# Altium PCB 9VPCB.PcbDoc
Units mil, origin at the board's own origin, x right, y up, seen from the top; angles counter-clockwise.
Board outline 6000 x 4000 mil, 4 copper layers (Top Layer, Signal Layer 1, GND, Bottom Layer), stack 30.634 mil thick; 34 components, 95 nets, 104 pads, 36 vias.
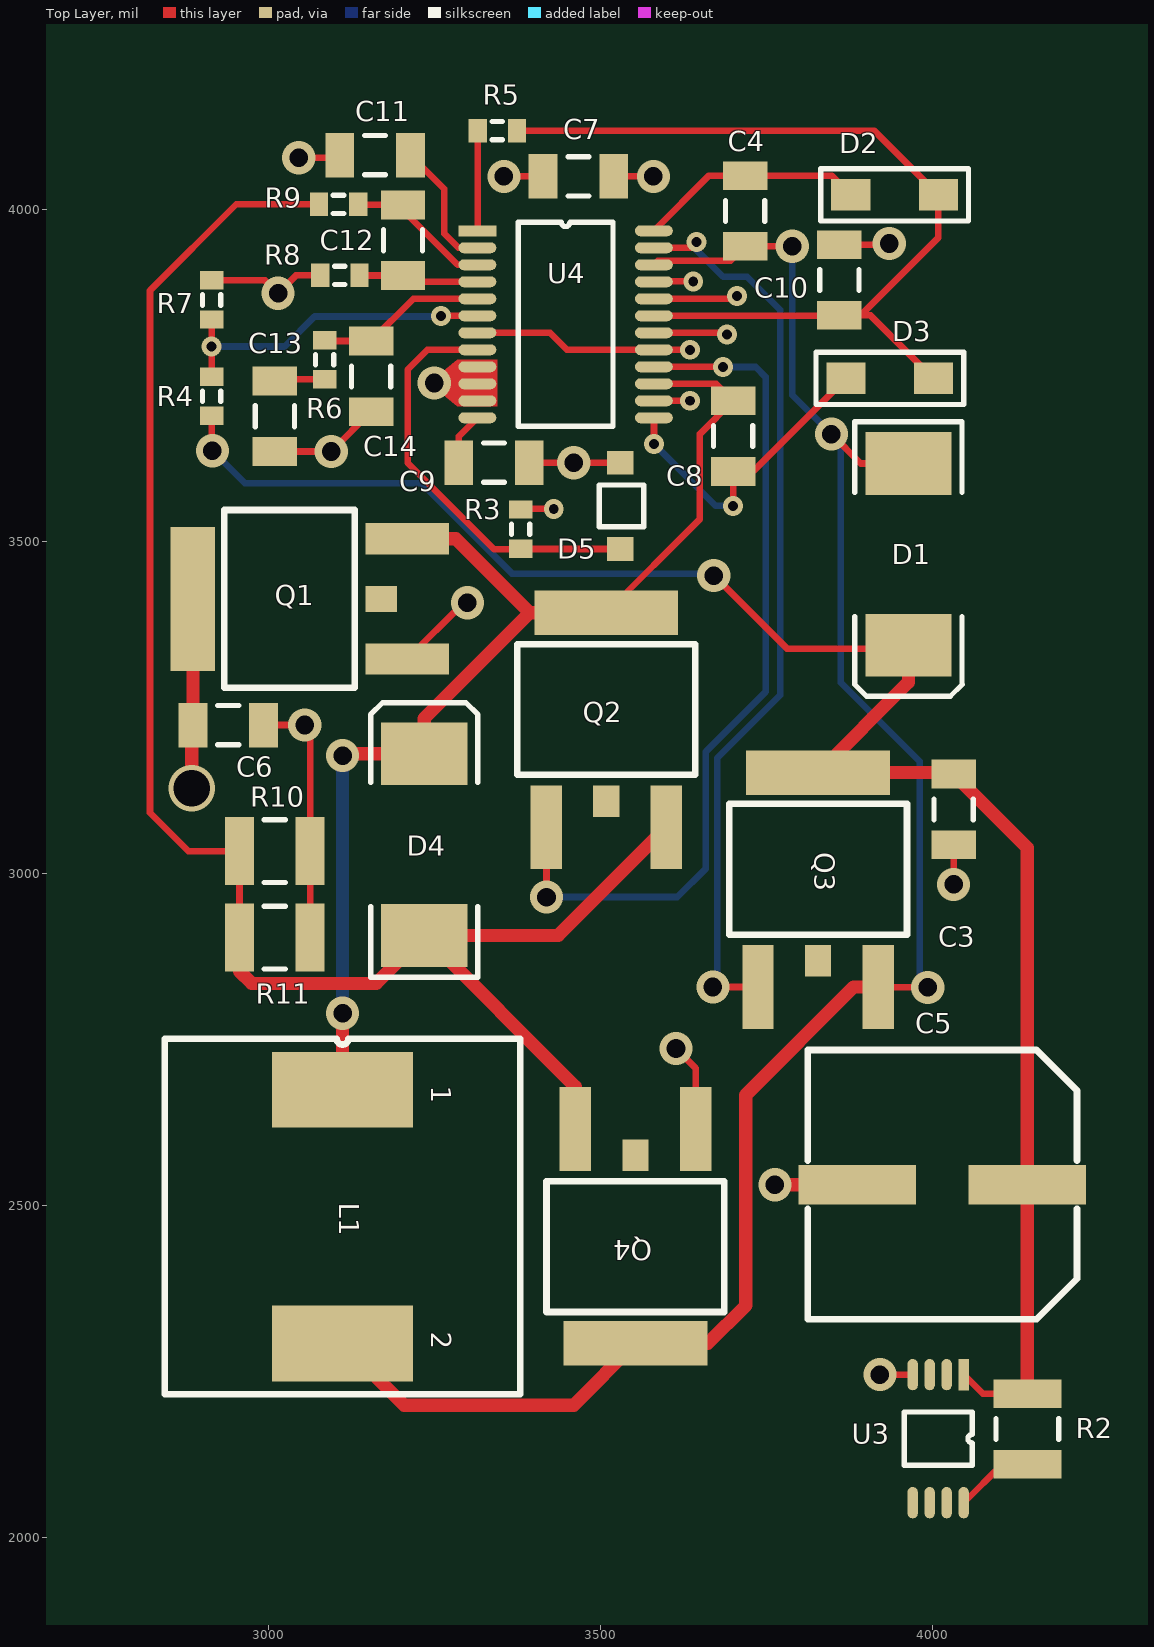
[diagram p0: Top Layer view]
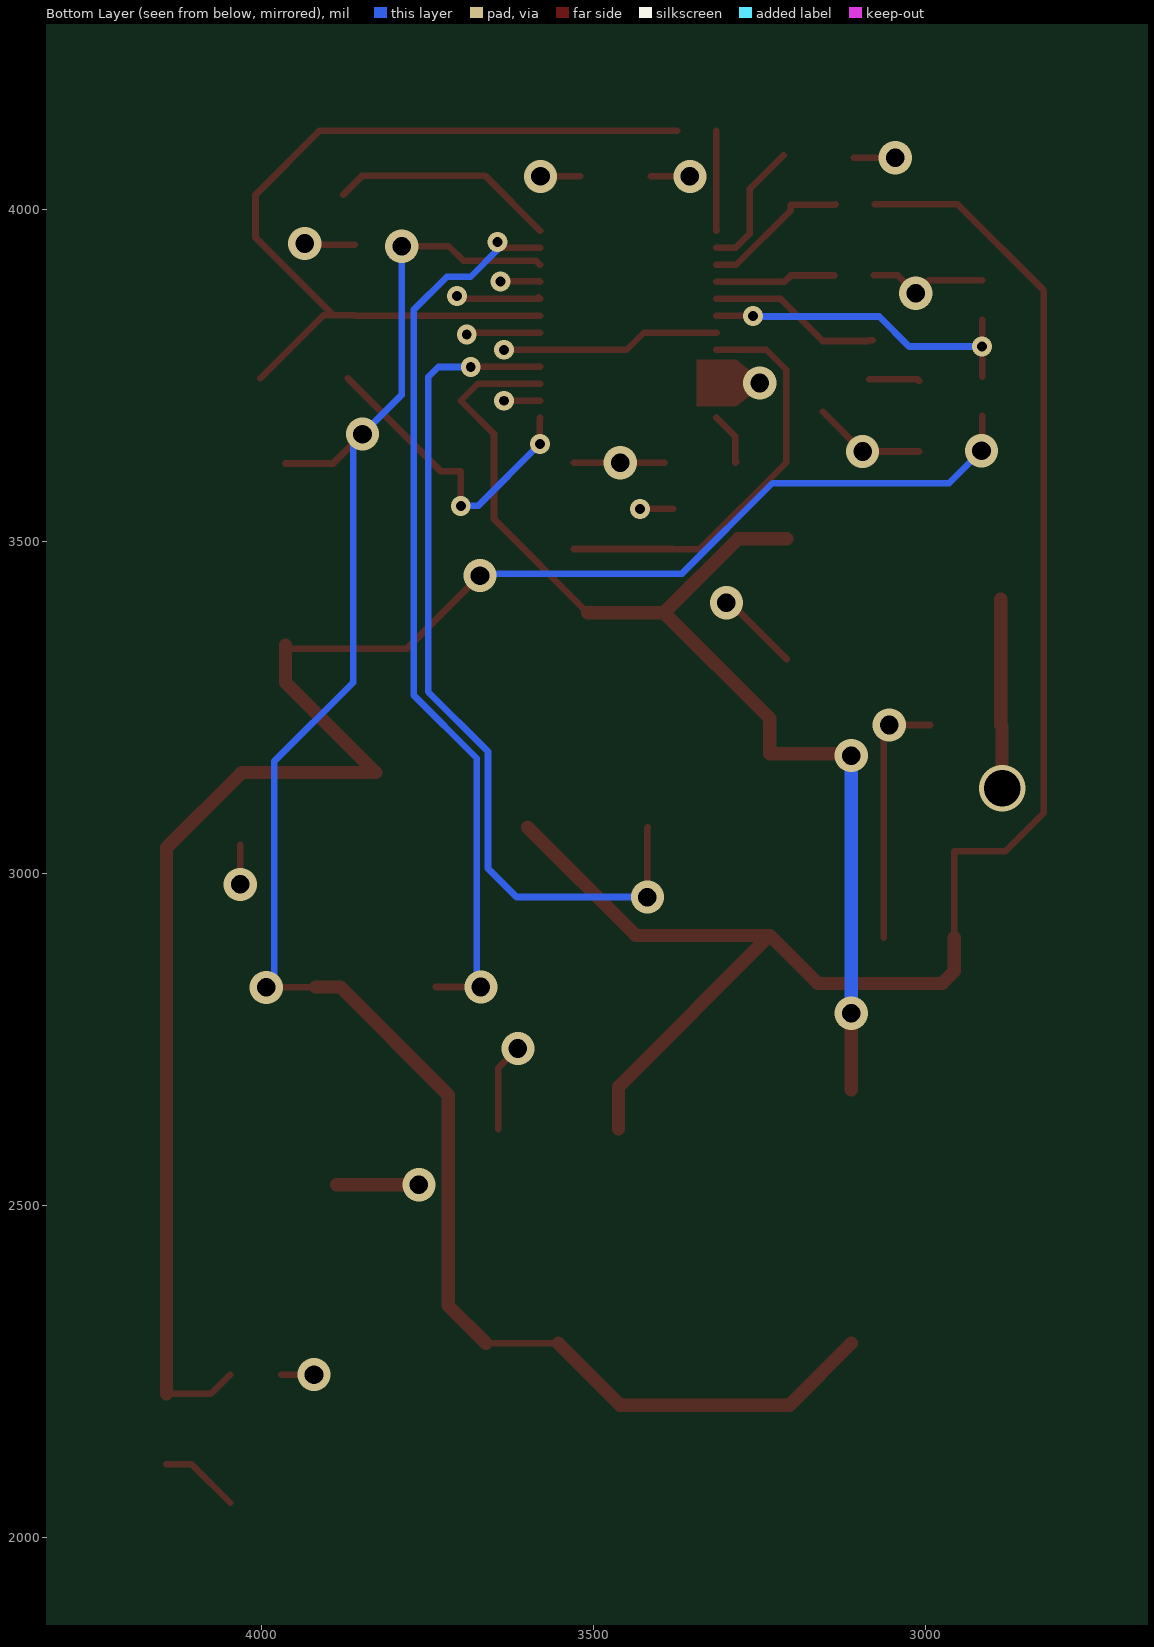
[diagram p1: Bottom Layer view, seen from below]
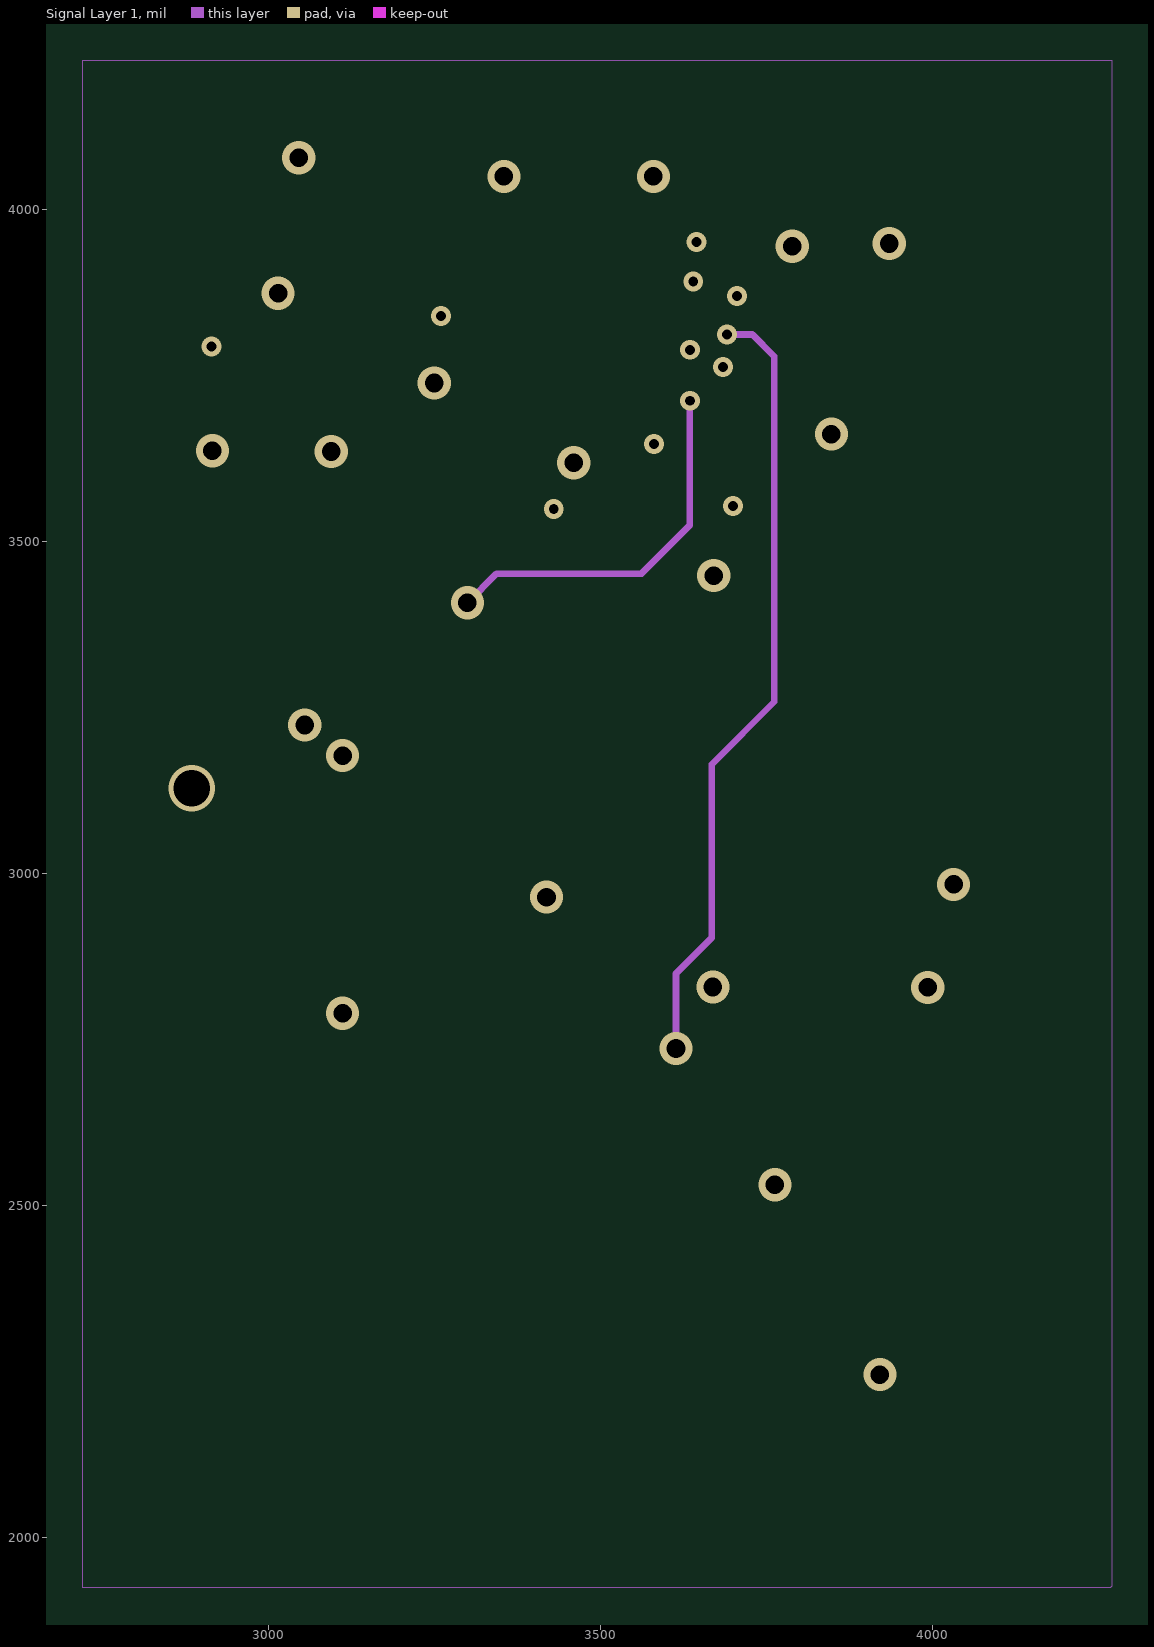
[diagram p2: Signal Layer 1]
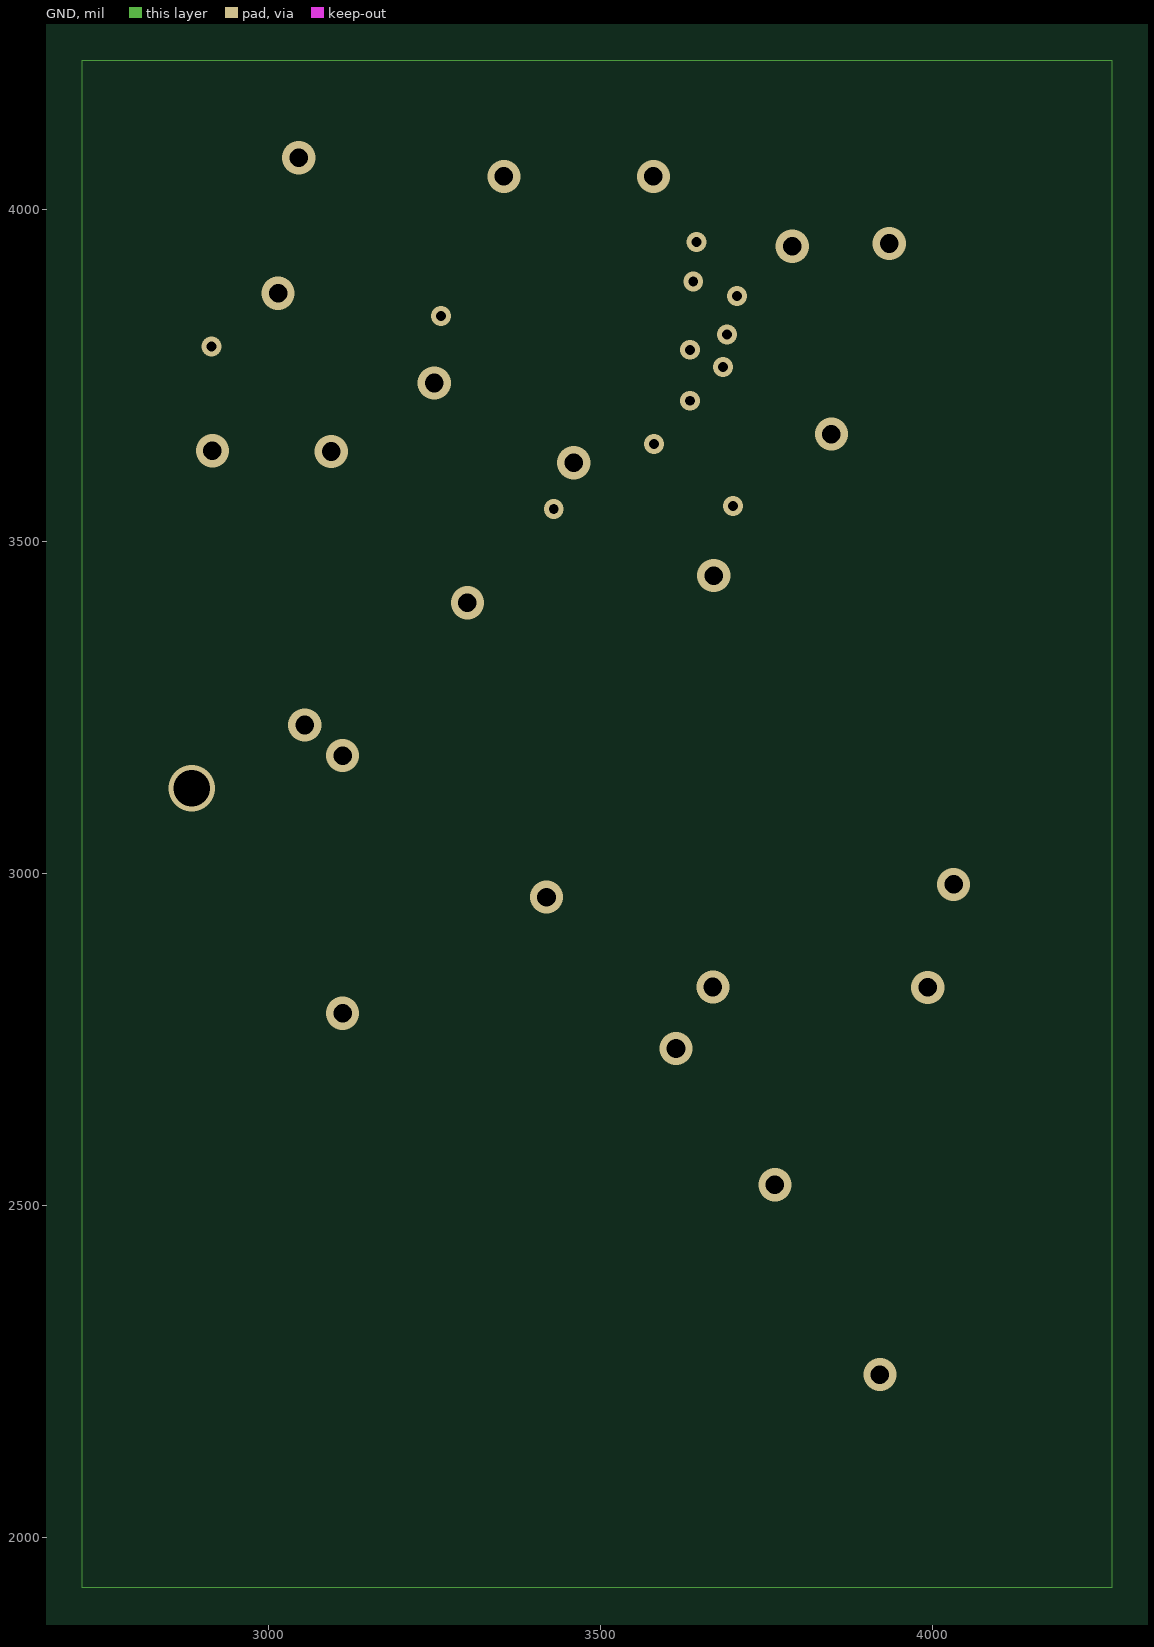
[diagram p3: GND]

## Layer stack, top to bottom
Top Solder: solder mask 0.4, Solder Resist, Dk 3.5
Top Layer: signal copper 1.4
Dielectric 1: core 10, FR-4, Dk 4.2
Signal Layer 1: signal copper 1.417
Dielectric 3: prepreg 5, Dk 4.2
GND: signal copper 1.417
Dielectric 2: core 10, Dk 4.2
Bottom Layer: signal copper 1.4
Bottom Solder: solder mask 0.4, Solder Resist, Dk 3.5

## Board outline
1000,1000 7000,1000 7000,5000 1000,5000

## Design rules (kind name [scope] priority, off if disabled: settings)
Clearance Clearance_2 [InNamedPolygon('GND-No Net')] p1: gap=10 ignorepadtopadclearanceinfootprint=FALSE except(0: Arc-Hole Track-Hole SMDPad-Hole THPad-Hole Via-Hole Fill-Hole Poly-Hole Region-Hole Text-Hole)
Clearance Clearance_1 [InNamedPolygon('NONET_L02_P008')] p2: gap=10 ignorepadtopadclearanceinfootprint=FALSE except(0: Arc-Hole Track-Hole SMDPad-Hole THPad-Hole Via-Hole Fill-Hole Poly-Hole Region-Hole Text-Hole)
Clearance [All] p3: gap=5 ignorepadtopadclearanceinfootprint=TRUE
PolygonConnect [All] p1: connectstyle=Relief reliefconductorwidth=10 reliefentries=4 polygonreliefangle="90 Angle" airgapwidth=10
RoutingVias [All] p1: holewidth=28 width=50 viastyle="Through Hole" minholewidth=15 minwidth=30 maxholewidth=60 maxwidth=80
SolderMaskExpansion [All] p1: expansion=4
Width [All] p1: maxlimit=50 minlimit=10 preferedwidth=10
30 further rules are at their usual default settings.

## Classes and differential pairs
component class Full_Power_Board: U13
component class 48V: U11 U12
component class 48V_0.5A: U9 U10
component class 19V: C28 D12 D13 D15 Q9 Q10 Q11 Q12 U7 U8
component class 12V: C16 D7 D8 D10 L2 Q5 Q6 Q7 Q8 U5 U6
component class 5V: U1 U2

## Components (designator, comment, footprint, x,y, rotation, side; value= is the part's Value field where it differs from the comment)
C3 "Cap Semi" C1206 4032,3097 r90 top value=22u
C4 "Cap Semi" C1206 3718,3998 r90 top value=0.22u
C5 "390uF" PCV1E391MCL2GS 4015.05,2532 r270 top
C6 "Cap Semi" C1206 2940,3224 r180 top value=27u
C7 "Cap Semi" C1206 3467,4050 r0 top value=3.3u
C8 "Cap Semi" C1206 3700,3659 r270 top value=0.22u
C9 "Cap Semi" C1206 3340,3619 r180 top value=0.001u
C10 "Cap Semi" C1206 3860,3894 r270 top value=4.7u
C11 "Cap Semi" C1206 3161,4082 r0 top value=0.001u
C12 "Cap Semi" C1206 3203,3954 r90 top value=100p
C13 "Cap Semi" C1206 3010,3689 r90 top value=0.01u
C14 "Cap Semi" C1206 3155,3749 r90 top value=100p
D1 "MBRS340" SMC 3964,3481 r270 top
D2 "1N5819HW" 1N5819HW 3943.15,4022.15 r180 top
D3 "1N5819HW" 1N5819HW 3936,3746 r180 top
D4 "MBRS340" SMC 3235,3044 r90 top
D5 "MMSZ5230B" MMSZ5230B 3530,3554 r270 top
L1 "SRR1240-4R7MCT" SRR1240-4R7M 3112,2484 r270 top
Q1 "BUK6212-40C" BUK6212-40C 3209.37,3323.45 r90 top
Q2 "BUK6212-40C" BUK6212-40C 3418.45,3070.17 r0 top
Q3 "BUK6212-40C" BUK6212-40C 3737.45,2829.63 r0 top
Q4 "BUK6212-40C" BUK6212-40C 3643.55,2615.83 r180 top
R2 "Res3" 14-1210 4143,2164 r270 top value=6m
R3 "Res3" J1-0603 3380,3519 r90 top value=51k
R4 "Res3" J1-0603 2915,3719 r270 top value=205k
R5 "Res3" J1-0603 3345,4119 r180 top value=100k
R6 "Res3" J1-0603 3085,3774 r90 top value=100k
R7 "Res3" J1-0603 2915,3864 r270 top value=20k
R8 "Res3" J1-0603 3108,3901 r180 top value=100
R9 "Res3" J1-0603 3106,4008 r180 top value=100
R10 "Res3" 14-1210 3010,3034 r180 top value=0.018
R11 "Res3" 14-1210 3010,2904 r180 top value=0.018
U3 "AD8217" AD8217 4047.18,2246 r270 top
U4 "LTC3780EG#PBF" "LTC3780 24-Leaqd Plastic SSOP" 3315,3968.13 r0 top

## Footprints (in the part's own frame and the unit in brackets; to place one, negate y for a bottom-side part, rotate by r counter-clockwise, add the part's x,y. Pads: shape width x height; smd on the part's side, far side on the other; paste and mask are expansions set on the pad)
1N5819HW [mm]
  rect 1.5x1.2 smd: 1(-1.675,0) 2(1.675,0)
  silkscreen extent -2.83,-1 2.83,1
14-1210 [mm] "Chip Resistor, Body 3.2x2.5mm, IPC High Density"
  rect 1.1x2.6 smd: 1(-1.35,0) 2(1.35,0)
  silkscreen extent -0.4,-1.2 0.4,1.2, body extent -1.68,-1.32 1.68,1.32, height 0.9
AD8217 [mm]
  rect 1.2x0.4 smd: 1(0,0)
  oval 1.2x0.4 smd: 2(0,-0.65) 3(0,-1.3) 4(0,-1.95) 5(4.9,-1.95) 6(4.9,-1.3) 7(4.9,-0.65) 8(4.9,0)
  silkscreen extent 1.43,-2.28 3.47,0.33
BUK6212-40C [mm]
  rect 1.2x3.2 smd: 1(0,0) 2(4.6,0)
  rect 5.5x1.7 smd: 3(2.3,8.2)
  rect 1x1.2 smd: 4(2.3,1)
  silkscreen extent -1.1,2 5.7,7
C1206 [mm] "Chip Capacitor, Body 3.2x1.6mm, IPC High Density"
  rect 1.1x1.7 smd: 1(-1.35,0) 2(1.35,0)
  silkscreen extent -0.4,-0.75 0.4,0.75, body extent -1.7,-0.9 1.7,0.9, height 1.3
J1-0603 [mm] "Chip Resistor, Body 1.6x0.8mm, IPC High Density"
  rect 0.7x0.9 smd: 1(-0.75,0) 2(0.75,0)
  silkscreen extent -0.2,-0.35 0.2,0.35, body extent -0.85,-0.48 0.85,0.48, height 0.9
"LTC3780 24-Leaqd Plastic SSOP" [mm]
  rect 1.45x0.42 smd: 1(0,0)
  oval 1.45x0.42 smd: 2(0,-0.65) 3(0,-1.3) 4(0,-1.95) 5(0,-2.6) 6(0,-3.25) 7(0,-3.9) 8(0,-4.55) 9(0,-5.2) 10(0,-5.85) 11(0,-6.5) 12(0,-7.15) 13(6.75,-7.15) 14(6.75,-6.5) 15(6.75,-5.85) 16(6.75,-5.2) 17(6.75,-4.55) 18(6.75,-3.9) 19(6.75,-3.25) 20(6.75,-2.6) 21(6.75,-1.95) 22(6.75,-1.3) 23(6.75,-0.65) 24(6.75,0)
  silkscreen extent 1.56,-7.48 5.19,0.33
MMSZ5230B [mm]
  rect 0.9x1.025 smd: 1(-1.65,0) 2(1.65,0)
  silkscreen extent -0.8,-0.8 0.8,0.9
PCV1E391MCL2GS [mm]
  rect 1.5x4.5 smd: 1(0,3.25) 2(0,-3.25)
  silkscreen extent -5.15,-5.15 5.15,5.15
SMC [mm] "DO-214-AB/SMC; 2 C-Bend Leads; Body 7.9 x 5.9 mm, inc. leads (LxW)"
  rect 2.4x3.3 smd: 1(-3.475,0) 2(3.475,0)
  silkscreen extent -5.07,-2.05 5.43,2.05
SRR1240-4R7M [mm]
  rect 2.9x5.4 smd: 1(-4.85,0) 2(4.85,0)
  silkscreen extent -6.8,-6.8 6.8,6.8

## Part data
C3 C4 C6 C7 C8 C9 C10 C11 C12 C13 C14: "Capacitor (Semiconductor SIM Model)", LatestRevisionDate=29-May-2009, LatestRevisionNote="IPC-7351 Footprint Added.", PackageDescription="Chip Capacitor", PackageReference=C1206, Published=8-Jun-2000, Publisher="Altium Limited"
C5: library part PCV1E391MCL2GS, "Aluminum Capacitor"
D1 D4: library part Diode, "Default Diode", Code_JEDEC=DO-214-AB, LatestRevisionDate=17-Jul-2002, LatestRevisionNote="Re-released for DXP Platform.", PackageDescription="DO-214-AB/SMC; 2 C-Bend Leads; Body 7.9 x 5.9 mm, inc. leads (LxW)", PackageReference=SMC, PackageVersion=Sep-1996, Published=8-Jun-2000, Publisher="Altium Limited"
D2 D3: "1A Schottky Barrier Rectifier"
D5: "Zener Diode"
L1: "Inductor"
Q1 Q2 Q3 Q4: "N-Channel TrenchMOS Intermediate Level FET"
R2 R3 R4 R5 R6 R7 R8 R9 R10 R11: "Resistor", LatestRevisionDate=29-May-2009, LatestRevisionNote="IPC-7351 Footprint Added.", PackageDescription="Chip Resistor", PackageReference=J1-0603, Published=8-Jun-2000, Publisher="Altium Limited"
U3: "Current Shunt Moniter"
U4: "Buck-boost Controller, Constant Frequency, Current Mode Control with Power Good Output, 24-pin SOP (G-24), -40 to 85 degC, Pb-Free", Frequency Sync Range="200kHz - 400kHz", Manufacturer="Linear Technology", PackageDesciption="24-Pin Plastic SSOP, Body 8.2 x 5.3 mm, Pitch 0.65 mm", Supplier Part Number 1=LTC3780EG#PBF-ND, ComponentLink1Description="Manufacturer URL", ComponentLink1URL=http://www.linear.com/, ComponentLink2Description=Datasheet, ComponentLink2URL=http://cds.linear.com/docs/en/datasheet/3780ff.pdf, ComponentLink3Description="Package Specification", ComponentLink3URL=http://cds.linear.com/docs/en/packaging/SSOP_24_05-08-1640.pdf, DatasheetVersion="Rev. F", Mounting Technology="Surface Mount", Number of Outputs=1, PackageReference=G-24, PackageVersion=Jun-10, PartNumber=LTC3780EG#PBF, RoHS=TRUE, Supplier 1=Digi-Key, Supplier 2=Farnell, Supplier 3=Newark, Supplier Part Number 2=1273545, Supplier Part Number 3=56M8395

## Via types
v1: diameter 50, hole 28, Top Layer to Bottom Layer, 23 vias
v2: diameter 30, hole 15, Top Layer to Bottom Layer, 12 vias
v3: diameter 70, hole 55, Top Layer to Bottom Layer, 1 vias

## Nets (pads, with @x,y where several pads share a name; then routed paths per layer and width w, separated by ;. In a path a pad name is that pad's centre, name@x,y a point inside that pad or via, vN(x,y) a via of type N, cw(c..) or ccw(c..) an arc to the next point about the centre after c; other vN are vias at no path point)
14.8V: C6.2 C7.2 Q1.3 R3.2 U4.21 | length 455.3
  Top Layer w10: Q1.3 Q1.3@2886.85,3413.69 ; R3.2@3380,3549.47 v2(3430,3549.47) ; C7.2 v1(3580,4050) ; U4.21 3581.39,3892 v2(3640,3892)
  Top Layer w20: v3(2885,3129) 2885,3222.15 C6.2 Q1.3@2886.85,3413.69
BG1-9V: Q4.1 U4.18 | length 1422
  Top Layer w10: U4.18 v2@3681.41,3814.59 ; v1(3614,2737) 3643.55,2707.45 Q4.1
  Signal Layer 1 w10: v1(3614,2737) 3614,2850 3668,2904 3668,3165 3762,3259 3762,3779 3729,3812 v2(3691,3812)
BG2-9V: Q2.1 U4.16 | length 1307.4
  Top Layer w10: Q2.1 3419,3069.61 v1(3419,2965) ; U4.16 v2@3677.41,3763.41
  Bottom Layer w10: v1(3419,2965) 3616,2965 3659,3008 3659,3184 3749,3274 3749,3748 3734,3763 v2(3685,3763)
GND: C3.1 C5.2 C6.1 C7.1 C9.1 C10.1 C11.1 C13.1 C14.1 D5.1 R7.1 R8.2 R10.1 R11.1 U3.4 U4.7 U4.9 U4.10 U4.11 U4.17 U4.20 | length 1783.9
  Top Layer w10: R7.1 2995.47,3893.53 v1(3015,3874) 3042,3901 R8.2 ; C6.1 v1(3055,3224) 3063.15,3215.85 R10.1 R11.1 ; C13.1 v1(3095,3635.85) C14.1 ; v1(3046,4078) C11.1@3107.85,4078 ; v1@3236.85,3725.85 v1(3250,3739) ; U4.7 3424.41,3814.59 3450,3789 U4.17 v2(3635,3789) ; v1(3355,4050) C7.1 ; C9.1 3393.19,3618.96 v1(3460,3618.96) D5.1 ; U4.20@3582.98,3868 U4.20 3701.77,3865.77 v2(3706,3870) ; C10.1 3933.15,3947.15 v1(3935,3949) ; v1(3921,2246) U3.4 ; v1(4032,2984) C3.1
  Top Layer w20: v1(3763,2532) C5.2
NetC2_2: 
NetC3_2: C3.2 C5.1 D1.2 Q3.3 R2.1 R4.2 U3.1 | length 2766.3
  Top Layer w10: R4.2 2915,3638 v1(2916,3637) ; v1(3671,3449) 3781,3339 3958.81,3339 D1.2 ; C3.2@4029.69,3152.46 C3.2 ; U3.1 4076.03,2217.15 R2.1
  Top Layer w20: D1.2 3964,3288.46 Q3.3 C3.2@4029.69,3152.46 ; C3.2 4143.07,3039.07 4143,3039 C5.1 R2.1
  Bottom Layer w10: v1(2916,3637) 2965,3588 3231,3588 3367,3452 3668,3452 v1(3671,3449)
NetC4_1: C4.1 D1.1 L1.2 Q3.2 Q4.3 U4.22 | length 2921
  Top Layer w10: Q4.3 3662,2293 ; U4.22 3586.8,3923 3696.15,3923 C4.1 3788.85,3944.85 v1(3789,3945) ; v1(3848,3662) 3892.19,3617.81 D1.1 ; Q3.2 3919.18,2829 v1(3993,2829)
  Top Layer w20: L1.2 3205.06,2200 3460,2200 Q4.3 ; 3662,2293 3719,2350 3719,2667 3881.63,2829.63 Q3.2
  Bottom Layer w10: v1(3789,3945) 3789,3721 v1(3848,3662) 3862,3648 3862,3288 3981,3169 3981,2841 v1(3993,2829)
NetC4_2: C4.2 D2.2 U4.24 | length 342.9
  Top Layer w10: U4.24 3663.76,4051.15 C4.2 3848.2,4051.15 D2.2
NetC8_1: C8.1 D4.2 L1.1 Q1.2 Q2.3 U4.15 | length 1774.1
  Top Layer w10: Q2.3 3650,3534 3650,3662.15 C8.1 3674.33,3737.82 U4.15
  Top Layer w20: L1.1 v1(3112,2790) ; v1@3116,3180.81 D4.2 3235,3234 3394,3393 ; Q1.2 3282.45,3504.55 3394,3393 ; Q2.3 3394,3393
  Bottom Layer w20: v1(3112,2790) v1(3112,3178)
NetC8_2: C8.2 D3.2 U4.13 | length 477.2
  Top Layer w10: U4.13 3581,3686.39 v2(3581,3647) ; v2(3700,3554) C8.2 3729.91,3605.85 D3.2
  Bottom Layer w10: v2(3581,3647) 3674,3554 v2(3700,3554)
NetC9_2: C9.2 U4.12 | length 81.9
  Top Layer w10: C9.2@3285,3620.85 C9.2 3286.85,3658.49 U4.12
NetC10_2: C10.2 D2.1 D3.1 R5.1 U4.19 | length 1365.3
  Top Layer w10: R5.1 3885,4119 3912.24,4119 D2.1 4009.09,3958.09 C10.2@3891.85,3840.85 ; U4.19 3859.33,3840.18 C10.2 C10.2@3891.85,3840.85 ; D3.1 3907.09,3840.85 C10.2@3891.85,3840.85
NetC11_2: C11.2 U4.2 | length 198
  Top Layer w10: C11.2 3265,4031.15 3265,3964 3286.46,3942.54 U4.2
NetC12_1: C12.1 R8.1 U4.4 | length 181.5
  Top Layer w10: R8.1 3137.68,3900.85 C12.1 3212.49,3891.36 U4.4
NetC12_2: C12.2 R9.1 U4.3 | length 221.9
  Top Layer w10: R9.1 3136.38,4007.15 C12.2 3203,3999.15 3285.2,3916.95 U4.3
NetC13_2: C13.2 R6.1 | length 76
  Top Layer w10: C13.2 3012.32,3744.47 R6.1
NetC14_2: C14.2 R6.2 U4.5 | length 261.9
  Top Layer w10: R6.2@3080,3803.53 R6.2 3086.38,3802.15 C14.2 3218.62,3865.77 U4.5
NetC15_2: 
NetC19_1: 
NetC19_2: 
NetC20_1: 
NetC20_2: 
NetC21_2: 
NetC22_2: 
NetC23_2: 
NetC24_1: 
NetC24_2: 
NetC25_2: 
NetC26_2: 
NetC27_2: 
NetC31_1: 
NetC31_2: 
NetC32_1: 
NetC32_2: 
NetC33_2: 
NetC34_2: 
NetC35_2: 
NetC36_1: 
NetC36_2: 
NetC37_2: 
NetC38_2: 
NetC39_2: 
NetC40_2: 
NetC41_2: 
NetC42_2: 
NetC43_2: 
NetC44_2: 
NetC45_2: 
NetC46_2: 
NetD4_1: D4.1 Q2.2 Q4.2 R9.2 R10.2 R11.2 | length 2567.2
  Top Layer w10: R11.2 R10.2 2880,3034 2822,3092 2822,3878 2952,4008 R9.2
  Top Layer w20: R11.2 2956.85,2853.15 2975,2835 3162.81,2835 D4.1 ; Q4.2 3462.45,2679.74 D4.1 ; Q2.2 3436.57,2907.19 D4.1
NetD5_2: D5.2 R3.1 U4.8 | length 631.7
  Top Layer w10: U4.8 3240,3789 3210,3759 3210,3619 3340.47,3488.53 3380,3488.53 3380.51,3489.04 D5.2
NetD9_1: 
NetD10_2: 
NetD14_1: 
NetD15_2: 
NetD16_1: 
NetD17_1: 
NetP2_3: 
NetP2_9: 
NetP2_10: U3.5
NetP2_11: 
NetP2_12: 
NetP2_13: 
NetP2_14: 
NetQ5_1: 
NetQ6_1: 
NetQ7_1: 
NetQ8_1: 
NetQ9_1: 
NetQ10_1: 
NetQ11_1: 
NetQ12_1: 
NetR2_2: R2.2 U3.8 | length 119.7
  Top Layer w10: U3.8 4104.94,2110.85 R2.2
NetR4_1: R4.1 R7.2 U4.6 | length 505.1
  Top Layer w10: R4.1 v2(2915,3794) R7.2 ; v2(3260,3840) 3260.18,3840.18 U4.6
  Bottom Layer w10: v2(2915,3794) 3025,3794 3070,3839 3259,3839 v2(3260,3840)
NetR5_2: R5.2 U4.1 | length 151.1
  Top Layer w10: U4.1 3315.47,3968.61 R5.2
NetR12_2: 
NetR14_2: 
NetR15_1: 
NetR22_2: 
NetR24_2: 
NetR25_1: 
NetR33_2: 
NetR34_1: 
NetR35_1: 
NetR37_2: 
NetR38_2: 
NetR40_2: 
NetR41_1: 
NetR42_1: 
NetR44_2: 
NetR45_2: 
NetU10_3: 
NetU12_3: 
TG1-9V: Q3.1 U4.23 | length 1372.2
  Top Layer w10: U4.23 3636.54,3942.54 v2(3645,3951) ; v1(3669.63,2829.63) Q3.1
  Bottom Layer w10: v2(3645,3951) 3645,3939 3685,3899 3721,3899 3771,3849 3771,3269 3676,3174 3676,2836 v1(3669.63,2829.63)
TG2-9V: Q1.1 U4.14 | length 750.6
  Top Layer w10: Q1.1 3293.92,3408 v1(3300,3408) ; U4.14 v2(3635,3712.23)
  Signal Layer 1 w10: v1(3300,3408) 3344,3452 3562,3452 3635,3525 v2(3635,3712.23)
pads on no net: Q1.4 Q2.4 Q3.4 Q4.4 U3.2 U3.3 U3.6 U3.7

## Polygon pours and split planes (outlines as drawn)
GND on GND "GND-No Net" (solid, shelved, pour order 4): 2720,4225 4270,4225 4270,1925 2720,1925
14.8V on Signal Layer 1 "NONET_L02_P008" (solid, shelved, pour order 8): 2721,4225 4270,4225 4270,1927 4268,1925 2721,1925

## Other copper
Top Layer:
  region net GND: 3252.5,3724
  region net GND: 3345,3774 3345,3704 3285,3704 3260,3724 3240,3724 3235,3729 3235,3749 3240,3754 3260,3754 3285,3774

## Text inside footprints (layer, text, board x,y; h text height)
L1: Top Overlay "2" at 3245.86,2310.77 h30 r270; Top Overlay "1" at 3245.86,2680.85 h30 r270